# Altium PCB PCB1.PcbDoc
Units mm, origin at the board's own origin, x right, y up, seen from the top; angles counter-clockwise.
Board outline 49.91 x 65.15 mm, 6 copper layers (Top Layer, GND, 5V, 3V3, GND2, Bottom Layer), stack 0.816 mm thick; 24 components, 33 nets, 138 pads, 20 vias.
Unrouted connection lines stored in the file: 6.
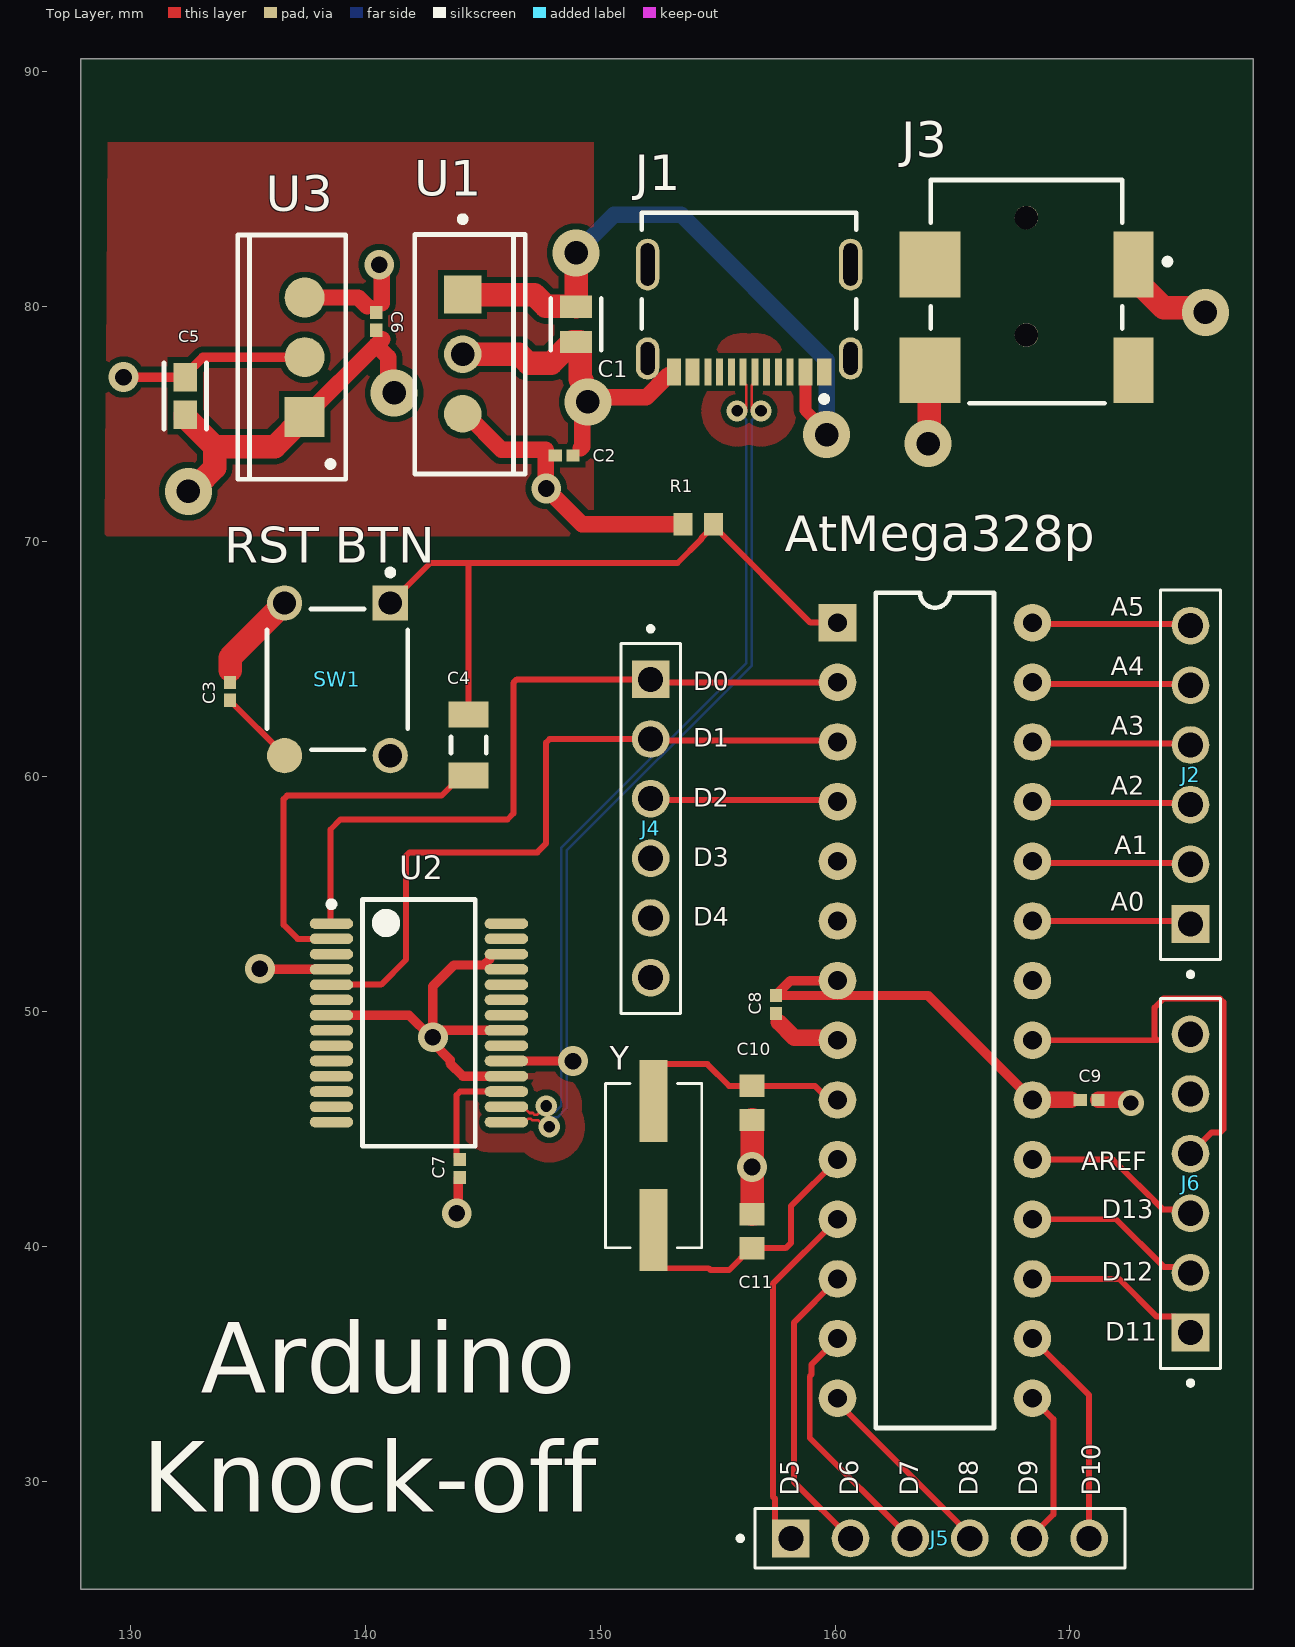
[diagram p0: Top Layer view]
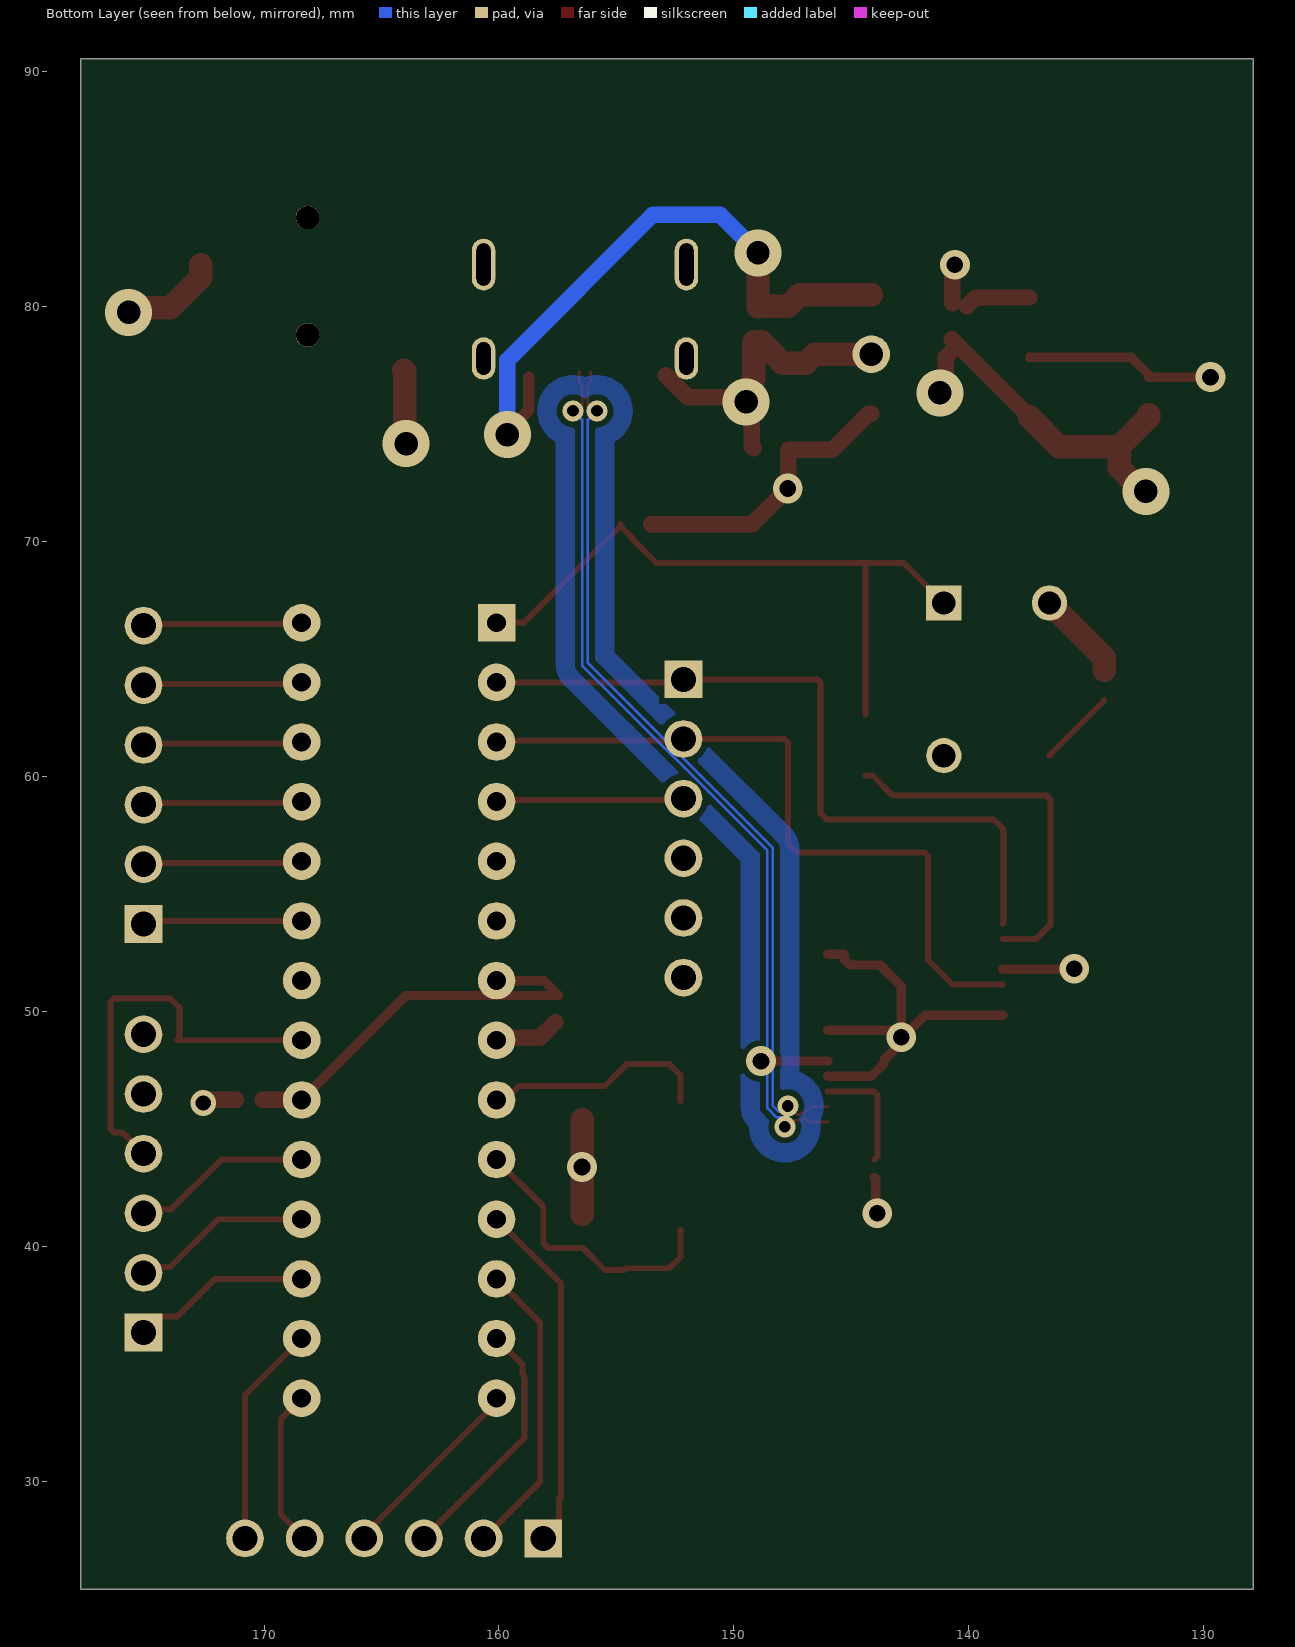
[diagram p1: Bottom Layer view, seen from below]
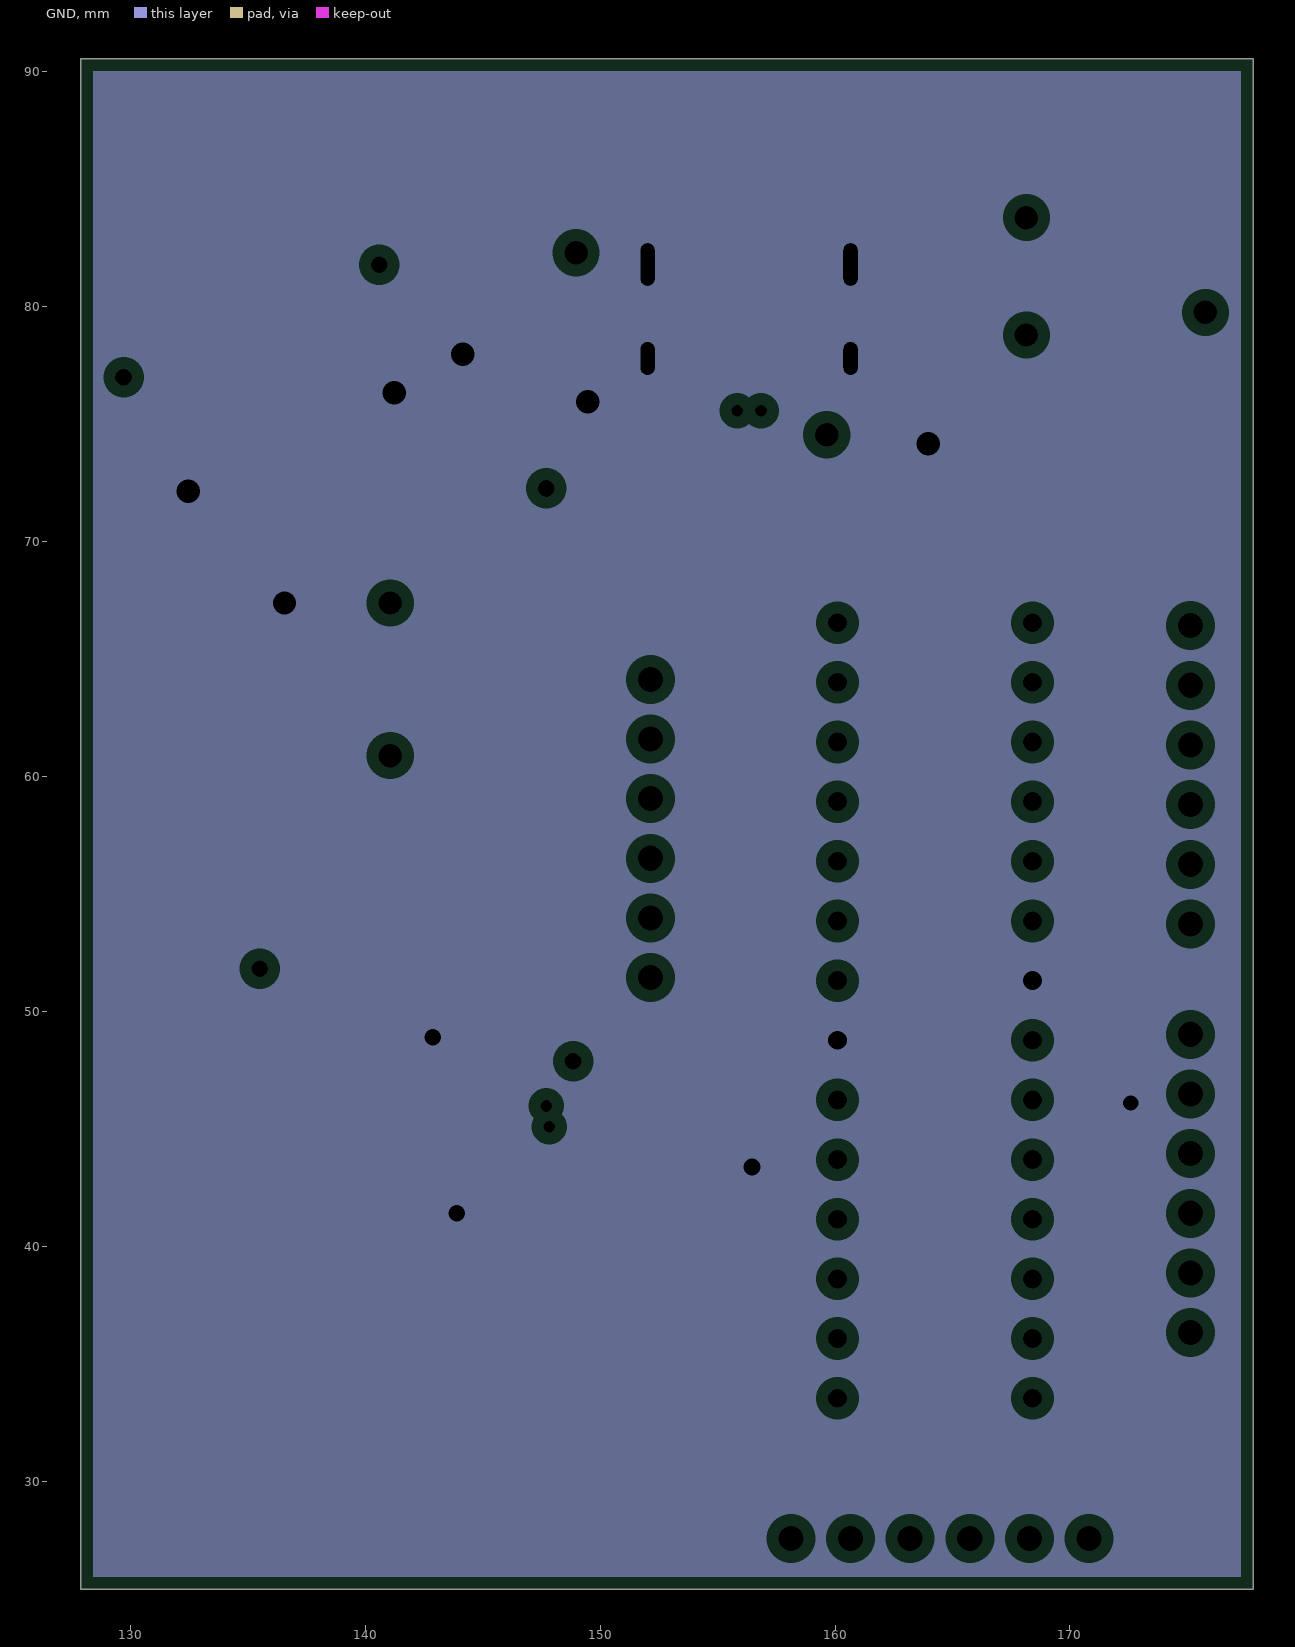
[diagram p2: GND, clearances drawn from the general rule]
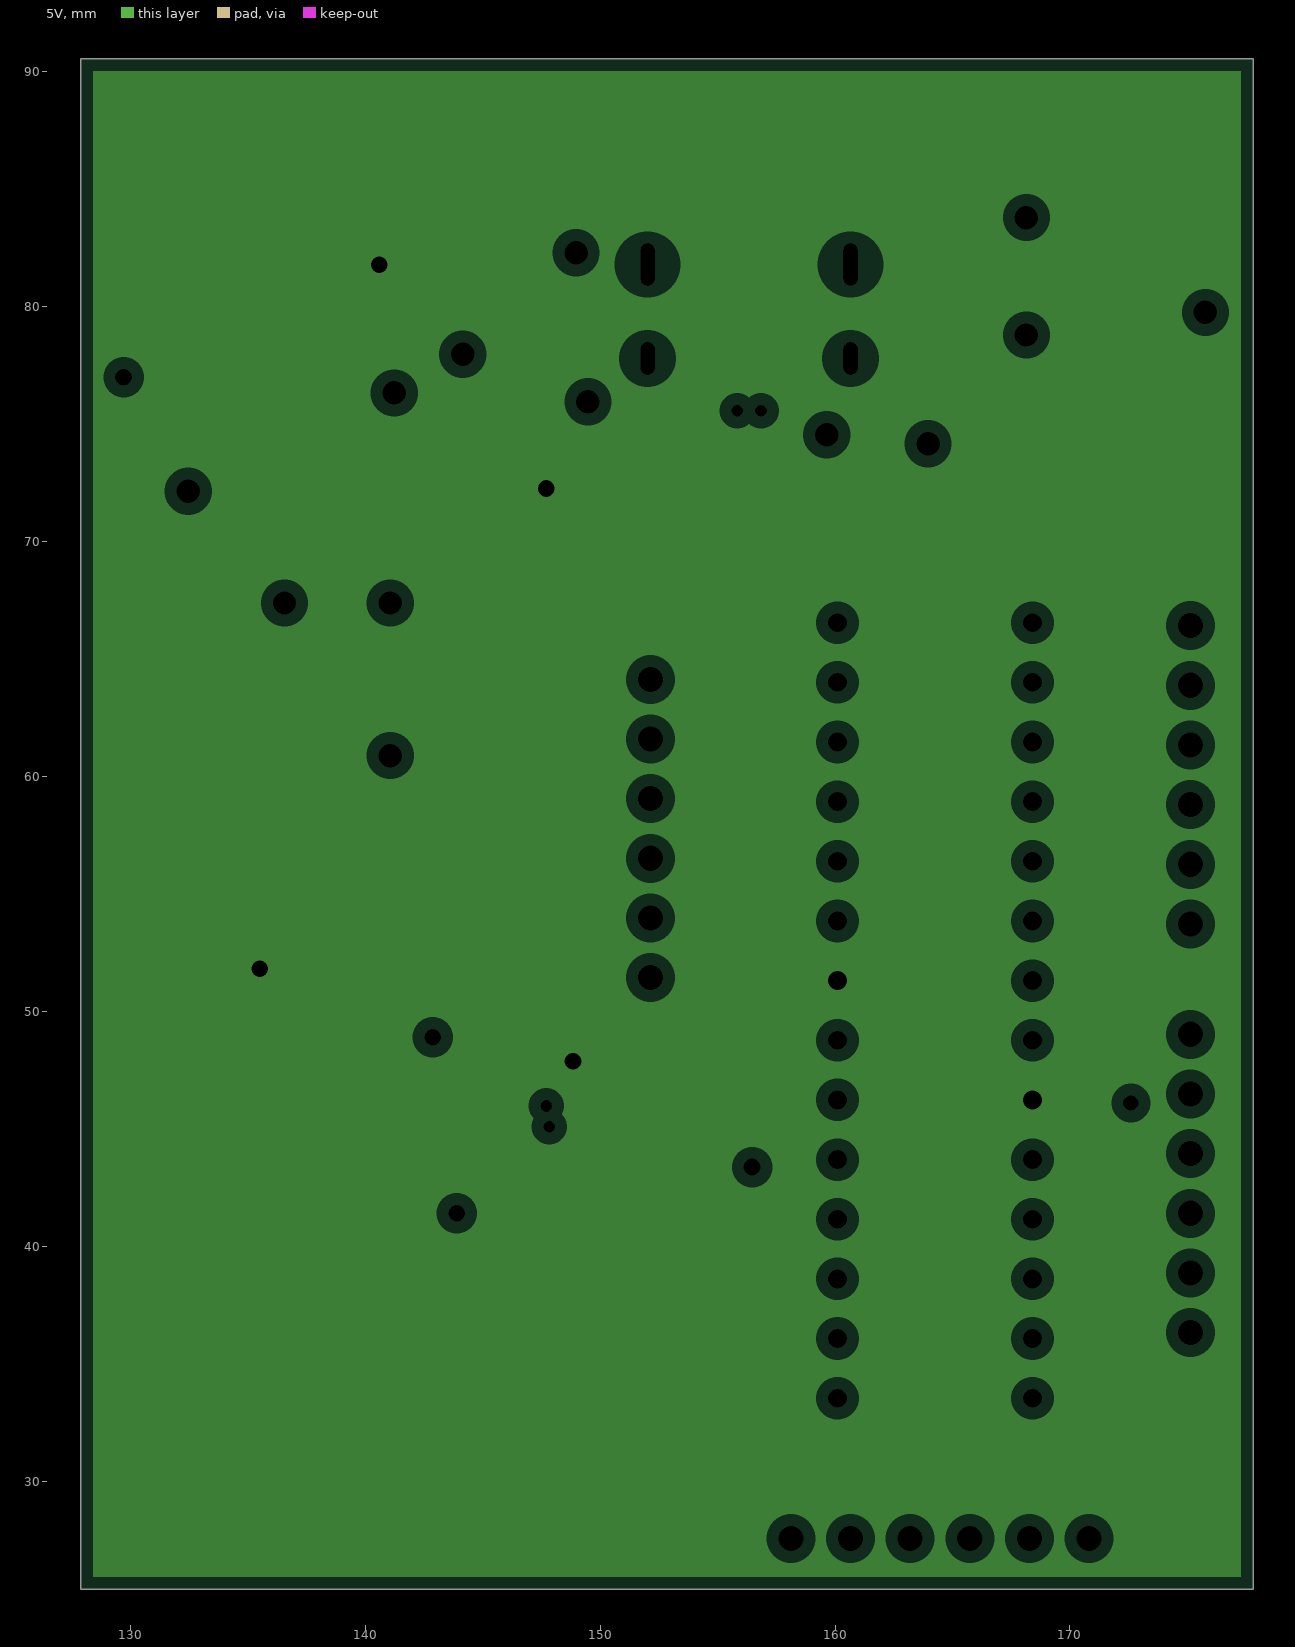
[diagram p3: 5V, clearances drawn from the general rule]
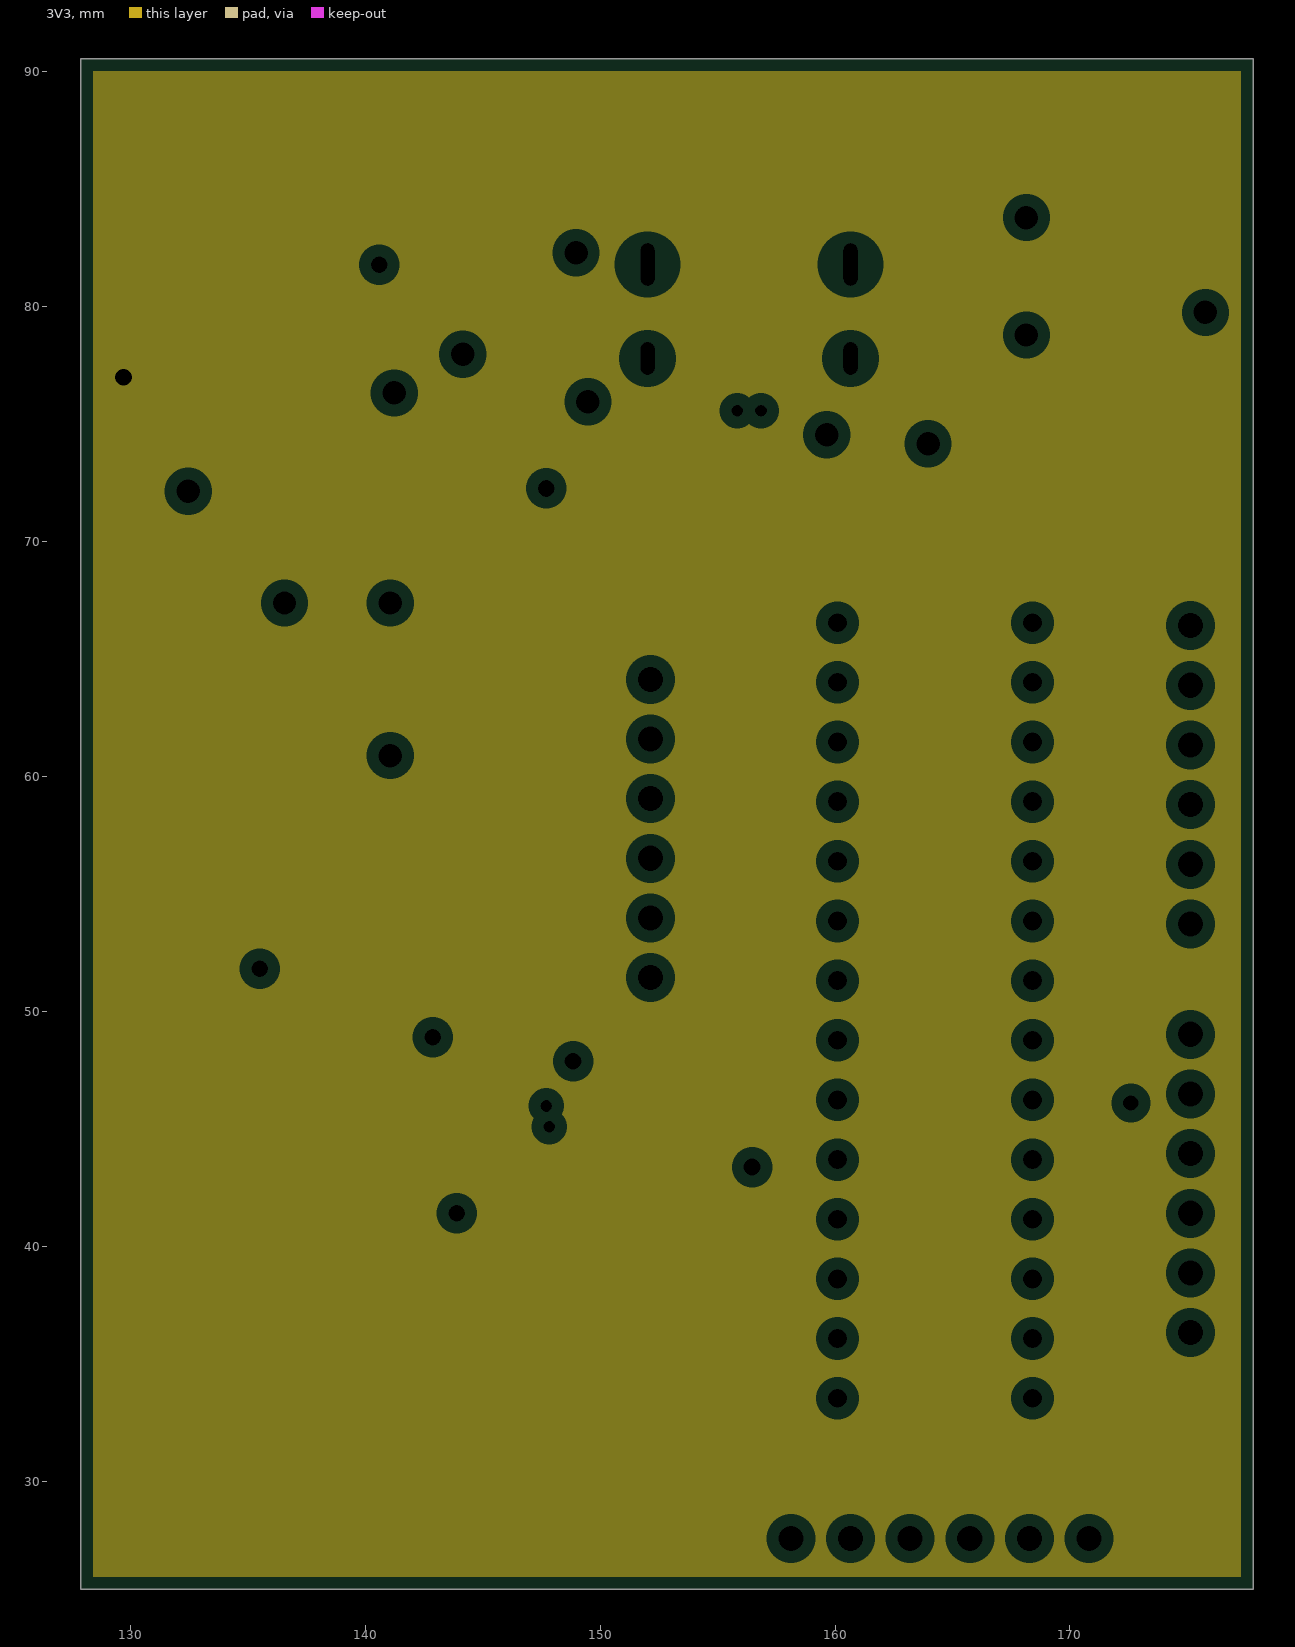
[diagram p4: 3V3, clearances drawn from the general rule]
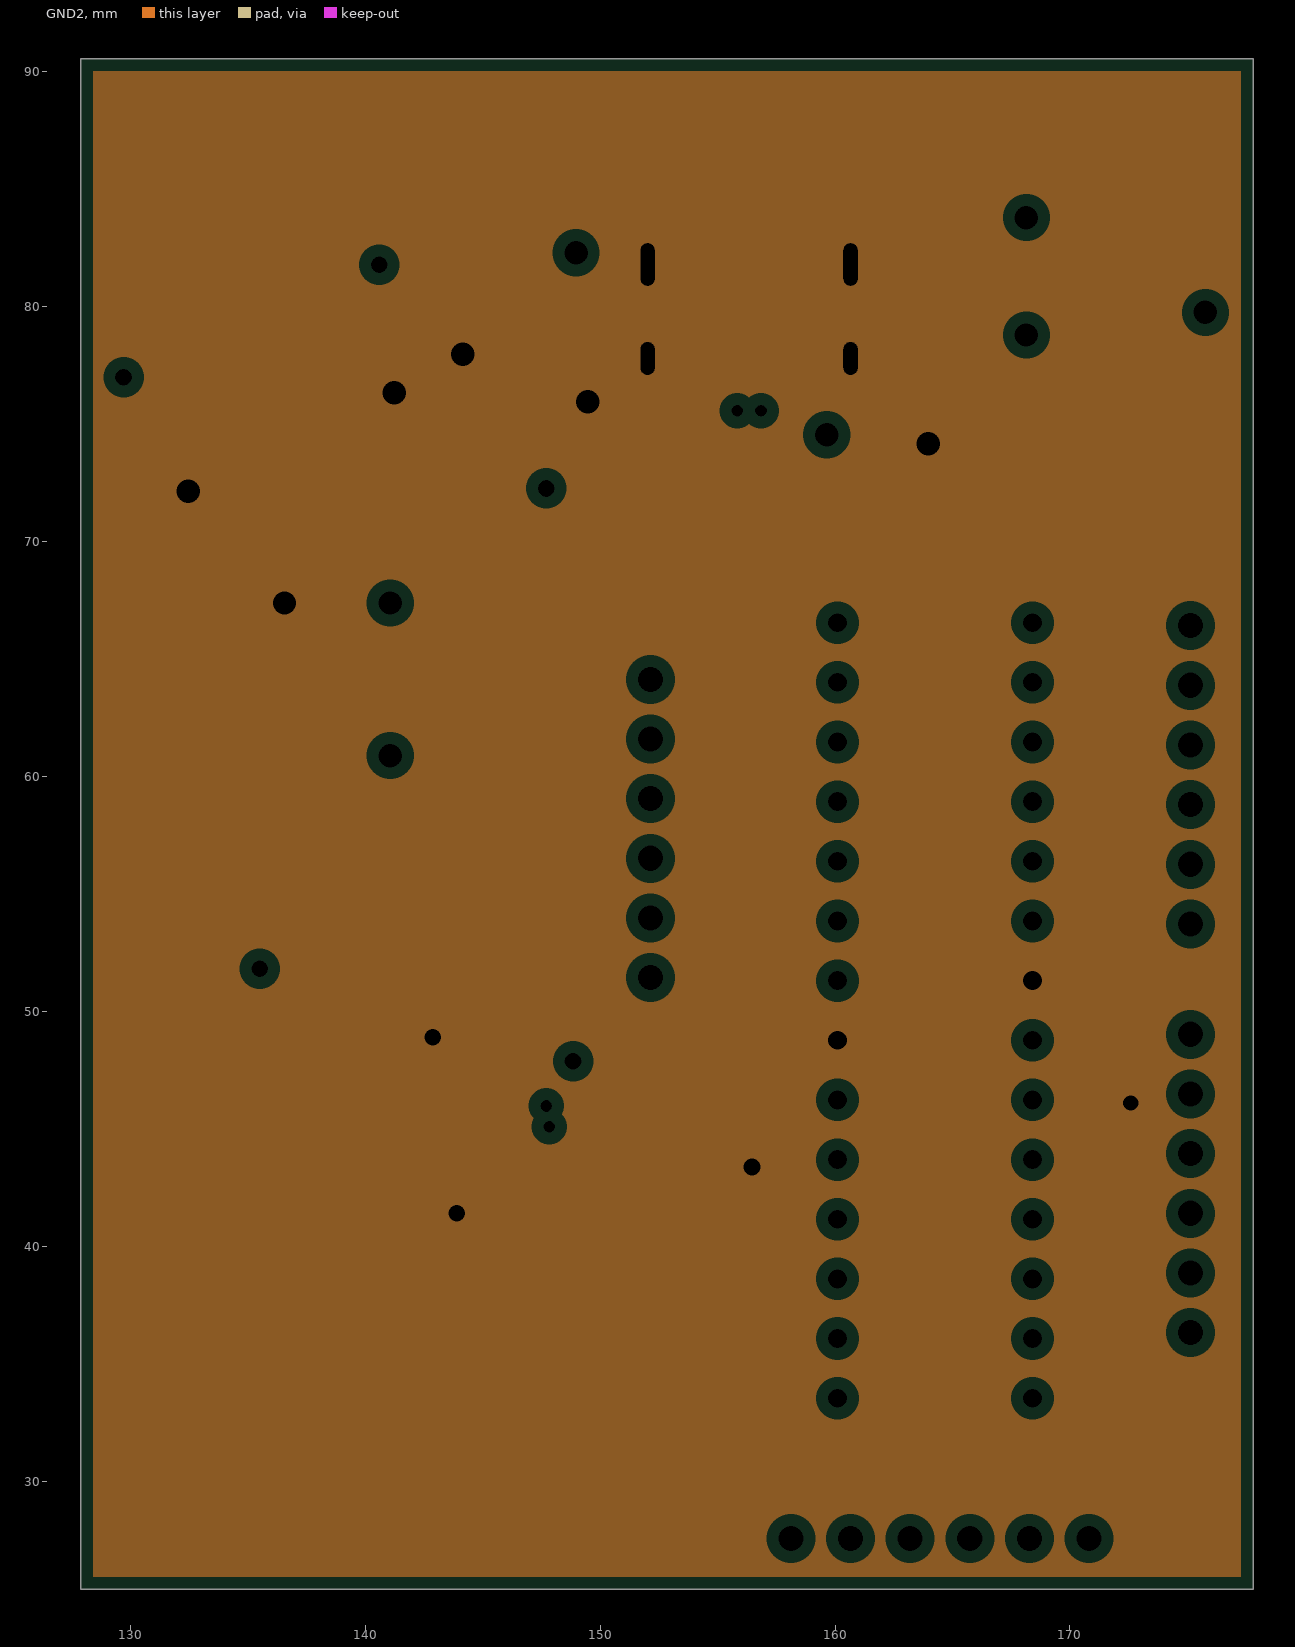
[diagram p5: GND2, clearances drawn from the general rule]
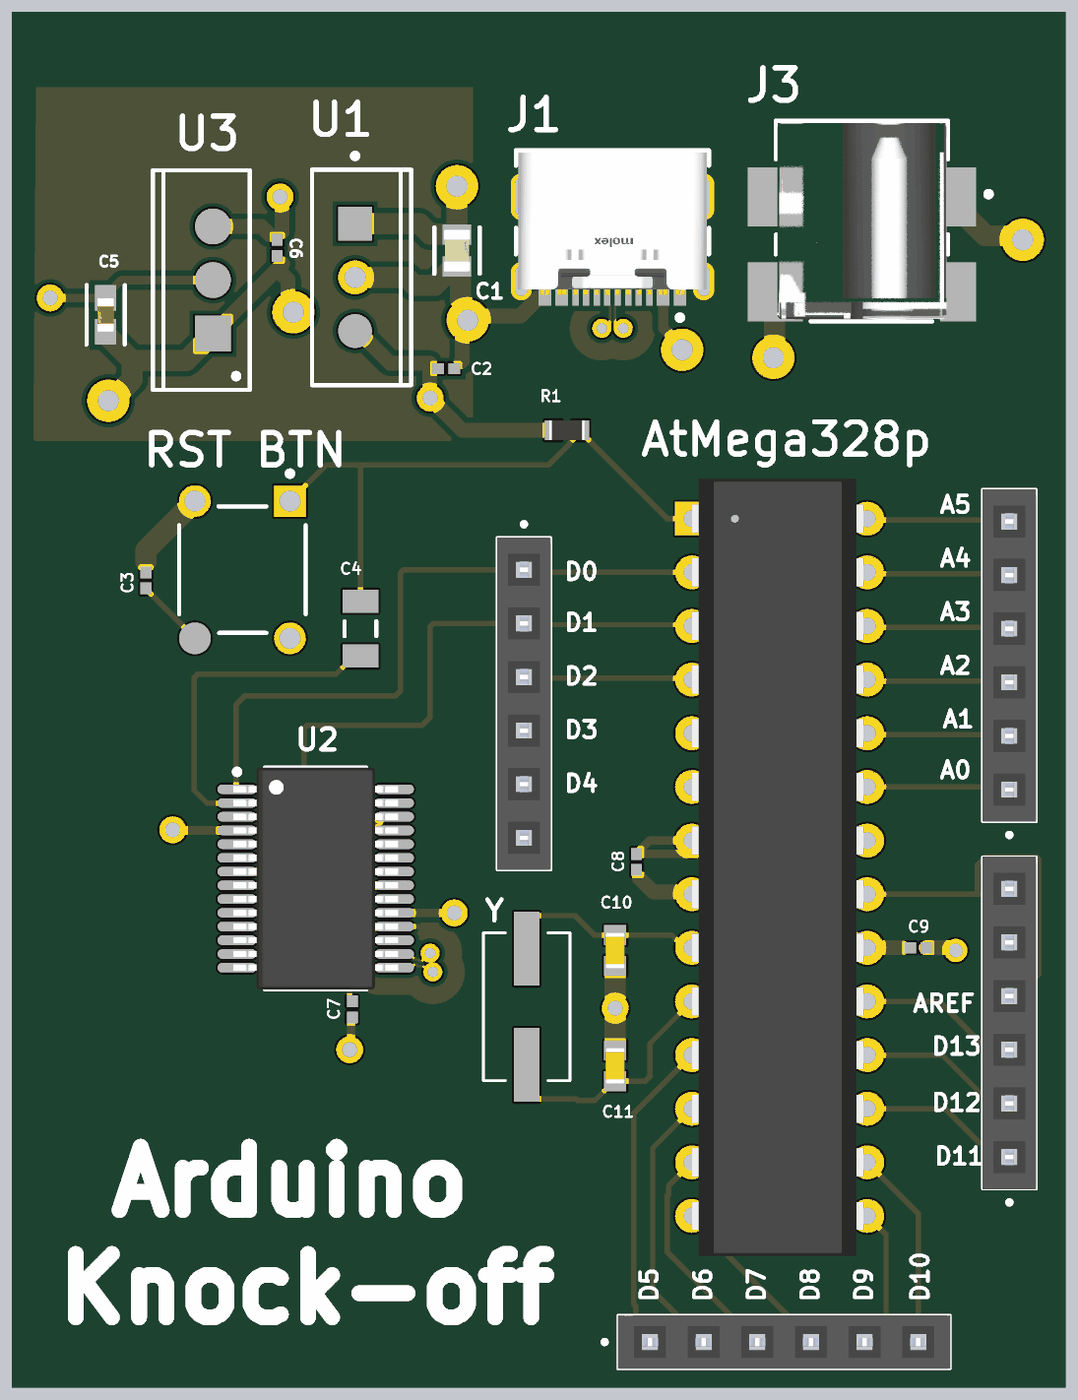
[diagram p6: 3D render of the assembled board from above, using the file's embedded part models]

## Layer stack, top to bottom
Top Solder: solder mask 0.0102, Solder Resist, Dk 3.5
Top Layer: signal copper 0.0356
Dielectric 2: prepreg 0.0711, PP-006, Dk 4.1
GND: plane copper 0.035, net GND
Dielectric 3: prepreg 0.0711, PP-006, Dk 4.1
5V: plane copper 0.035, net +5
Dielectric 1: dielectric 0.32, FR-4, Dk 4.8
3V3: plane copper 0.035, net 3V3
Dielectric 4: prepreg 0.0711, PP-006, Dk 4.1
GND2: plane copper 0.035, net GND
Dielectric 5: prepreg 0.0711, PP-006, Dk 4.1
Bottom Layer: signal copper 0.0356
Bottom Solder: solder mask 0.0102, Solder Resist, Dk 3.5

## Board outline
127.889,25.4 177.8,25.4 177.8,90.551 127.889,90.551

## Design rules (kind name [scope] priority, off if disabled: settings)
Clearance [All] p1: gap=0.254 ignorepadtopadclearanceinfootprint=TRUE except(0: Arc-Hole Track-Hole SMDPad-Hole THPad-Hole Via-Hole Fill-Hole Poly-Hole Region-Hole Text-Hole; 0.05: Arc-SMDPad Track-SMDPad; 0.1: SMDPad-SMDPad; 0.15: Arc-Arc Arc-Track Arc-THPad Track-Track Track-THPad)
DiffPairsRouting [All] p1: maxlimit=0.127 minlimit=0.127 mostfreqgap=0.127 toplayer_minwidth=0.111 toplayer_maxwidth=0.111 toplayer_prefwidth=0.111 bottomlayer_minwidth=0.111 bottomlayer_maxwidth=0.111 bottomlayer_prefwidth=0.111 impedanceprofiledriven=TRUE impedanceprofileid={53F72270-B1B1-47CD-B145-EBD3C2903551} impedanceprofilevalue=90.000000 maxuncoupledlength=12.7
PlaneClearance [All] p1: clearance=0.508
PlaneConnect [All] p1: planeconnectstyle=Relief reliefexpansion=0.508 reliefentries=4 reliefconductorwidth=0.254 reliefairgap=0.254
PolygonConnect [All] p1: connectstyle=Relief reliefconductorwidth=0.254 reliefentries=4 polygonreliefangle="90 Angle" airgapwidth=0.254
RoutingVias [All] p1: holewidth=0.711 width=1.27 viastyle="Through Hole" minholewidth=0.711 minwidth=1.27 maxholewidth=0.711 maxwidth=1.27
SolderMaskExpansion [All] p1: expansion=0.102 istentingtop=FALSE
Width Width_3V3 [InNet('3V3')] p1: maxlimit=0.4 minlimit=0.4 preferedwidth=0.4 minimp=50.000000 maximp=50.000000 favimp=50.000000
Width Width_5V [InNet('+5')] p2: maxlimit=0.7 minlimit=0.4 preferedwidth=0.4 minimp=50.000000 maximp=50.000000 favimp=50.000000
Width Width_GND [InNet('GND')] p3: maxlimit=1 minlimit=0.4 preferedwidth=1 minimp=50.000000 maximp=50.000000 favimp=50.000000
Width Width_VCC [InNet('VCC')] p4: maxlimit=1 minlimit=0.5 preferedwidth=1 minimp=50.000000 maximp=50.000000 favimp=50.000000
Width [All] p5: maxlimit=0.254 minlimit=0.254 preferedwidth=0.254
27 further rules are at their usual default settings.

## Classes and differential pairs
differential pair class USB_DIFF: USB
net class USB_DIFFPAIR: USB_N USB_P
component class Sheet1: AtMega328p C1 C2 C3 C4 C5 C6 C7 C8 C9 C10 C11 J1 J2 J3 J4 J5 J6 R1 SW1
differential pair USB: +USB_P -USB_N

## Components (designator, comment, footprint, x,y, rotation, side; value= is the part's Value field where it differs from the comment)
AtMega328p "ATMEGA328-PU" "atmega v2 - duplicate" 160.102,66.548 r0 top (schematic designator *)
C1 "C0805C334K5RACTU" FP-C0805C-DN-MFG 148.971,79.248 r270 top value="0.33 μF"
C2 "C0402C104K4RACTU" CAPC1005X55X30LL05T10 148.463,73.66 r180 top
C3 "C0402C104K4RACTU" CAPC1005X55X30LL05T10 134.239,63.627 r270 top
C4 "C1206C105K5RACTU" CAPC3216X110X50LL20T25 144.399,61.341 r270 top
C5 "GRM188R60J106ME47D" FP-GRM188-0_1-e0_2_0_55-IPC_A 132.334,76.2 r270 top
C6 "C0402C104K4RACTU" CAPC1005X55X30LL05T10 140.462,79.375 r90 top
C7 "C0402C104K4RACTU" CAPC1005X55X30LL05T10 144.018,43.307 r90 top
C8 "C0402C104K4RACTU" CAPC1005X55X30LL05T10 157.48,50.292 r90 top
C9 "C0402C104K4RACTU" CAPC1005X55X30LL05T10 170.815,46.228 r180 top
C10 "GRM1885C1H220JA01D" CAPC1608X90X35ML10T15 156.464,46.101 r90 top
C11 "GRM1885C1H220JA01D" CAPC1608X90X35ML10T15 156.464,40.64 r270 top
J1 "217179-0001" FP-2171790001-MFG 156.337,80.645 r180 top
J2 "PPTC061LFBN-RC" SULLINS_PPTC061LFBN-RC 175.133,60.071 r90 top
J3 "PJ-018H-SMT-TR" FP-PJ-018H-SMT-TR-MFG 168.148,80.645 r270 top
J4 "PPTC061LFBN-RC" SULLINS_PPTC061LFBN-RC 152.146,57.785 r270 top
J5 "PPTC061LFBN-RC" SULLINS_PPTC061LFBN-RC 164.465,27.559 r0 top
J6 "PPTC061LFBN-RC" SULLINS_PPTC061LFBN-RC 175.133,42.672 r90 top
R1 "CRCW060310K0FKEA" RESC1609X50X30NL8T20 154.178,70.739 r0 top
SW1 "1825910-6" TECO-1825910-6_V 138.811,64.135 r270 top
U1 "LM7805ACT" FAIR-TO-220-3 144.145,77.978 r0 top
U2 "FT232RL" FTDI-SSOP-28_M 142.282,49.511 r0 top
U3 "LD1117V33C" TO220 137.414,77.851 r90 top
Y "ECS-160-20-3X-TR" XTAL_ECS-160-20-3X-TR 152.273,43.434 r270 top

## Footprints (in the part's own frame and the unit in brackets; to place one, negate y for a bottom-side part, rotate by r counter-clockwise, add the part's x,y. Pads: shape width x height; smd on the part's side, far side on the other; paste and mask are expansions set on the pad)
"atmega v2 - duplicate" [mm]
  rect 1.6x1.6 hole 0.8: 1(0,0)
  round 1.6 hole 0.8: 2(0,-2.54) 3(0,-5.08) 4(0,-7.62) 5(0,-10.16) 6(0,-12.7) 7(0,-15.24) 8(0,-17.78) 9(0,-20.32) 10(0,-22.86) 11(0,-25.4) 12(0,-27.94) 13(0,-30.48) 14(0,-33.02) 15(8.3,-33.02) 16(8.3,-30.48) 17(8.3,-27.94) 18(8.3,-25.4) 19(8.3,-22.86) 20(8.3,-20.32) 21(8.3,-17.78) 22(8.3,-15.24) 23(8.3,-12.7) 24(8.3,-10.16) 25(8.3,-7.62) 26(8.3,-5.08) 27(8.3,-2.54) 28(8.3,0)
  silkscreen extent 1.63,-34.29 6.67,1.27, body extent 0,-34.92 8.12,1.91, height 5.21
CAPC1005X55X30LL05T10 [mm] "Chip Capacitor, 2-Leads, Body 1.00x0.50mm, IPC High Density"
  rect 0.56x0.52 smd: 1(-0.38,0) 2(0.38,0)
  body extent -0.53,-0.28 0.53,0.28, height 0.55
CAPC1608X90X35ML10T15 [mm] "Chip Capacitor, 2-Leads, Body 1.7x0.9mm, IPC Low Density"
  rect 0.95x1.05 smd: 1(-0.725,0) 2(0.725,0)
  body extent -0.85,-0.45 0.85,0.45, height 0.9
CAPC3216X110X50LL20T25 [mm] "Chip Capacitor, 2-Leads, Body 3.20x1.60mm, IPC High Density"
  rect 1.1x1.7 smd: 1(-1.3,0) 2(1.3,0)
  silkscreen extent -0.35,-0.75 0.35,0.75, body extent -1.7,-0.9 1.7,0.9, height 1.1
FAIR-TO-220-3 [mm] "FM, 3-Leads, Body 10.2x4.7mm, Pitch 2.54mm"
  rect 1.6x1.6 smd: 1(0,2.54)
  round 1.6 hole 1: 2(0,0)
  round 1.6 smd: 3(0,-2.54)
  silkscreen extent -2.04,-5.1 2.66,5.87, body extent -2.04,-5.1 2.66,5.1, height 18.95
FP-2171790001-MFG [mm]
  rrect100% 1x1.8 hole 1.4 slot 0.6 at 0 deg paste-1000 mask+0: 1(-4.32,2.85) 2(4.32,2.85)
  rrect100% 1x2.2 hole 1.8 slot 0.6 at 0 deg paste-1000 mask+0: 3(-4.32,-1.15) 4(4.32,-1.15)
  rect 0.6x1.15 smd paste+0 mask+0: A1-B12(-3.2,3.425) A4-B9(-2.4,3.425) B1-A12(3.2,3.425) B4-A9(2.4,3.425)
  rect 0.3x1.15 smd paste+0 mask+0: A5(-1.25,3.425) A6(-0.25,3.425) A7(0.25,3.425) A8(1.25,3.425) B5(1.75,3.425) B6(0.75,3.425) B7(-0.75,3.425) B8(-1.75,3.425)
  silkscreen extent -4.57,-3.35 4.57,4.7, body extent -4.92,-3.45 4.92,4.1, height 0.25
FP-C0805C-DN-MFG [mm]
  rect 0.95x1.35 smd paste+0 mask+0: 1(-0.75,0) 2(0.75,0)
  silkscreen extent -1.1,-1.07 1.1,1.07, body extent -1.4,-0.85 1.4,0.85, height 0.25
FP-GRM188-0_1-e0_2_0_55-IPC_A [mm]
  rect 1.208x1.012 smd paste+0 mask+0: 1(-0.802,0) 2(0.802,0)
  silkscreen extent -1.41,-0.91 1.41,0.91, body extent -1.91,-1.01 1.91,1.01, height 0.25
FP-PJ-018H-SMT-TR-MFG [mm]
  rect 2.8x1.7 smd paste+0 mask+0: 1(-1.15,4.55) 1(3.35,4.55)
  rect 2.8x2.6 smd paste+0 mask+0: 2(-1.15,-4.1) 3(3.35,-4.1)
  round 1 hole 1 unplated paste-1000 mask+0: ""(-3.15,0) ""(1.85,0)
  silkscreen extent -4.75,-4.08 4.75,6.13, body extent -4.85,-5.5 4.85,5.5, height 0.25
FTDI-SSOP-28_M [mm] "SOP, 28-Leads, Body 10.5x5.6mm, Pitch 0.65mm, IPC Low Density"
  oval 1.85x0.45 smd: 1(-3.725,4.225) 2(-3.725,3.575) 3(-3.725,2.925) 4(-3.725,2.275) 5(-3.725,1.625) 6(-3.725,0.975) 7(-3.725,0.325) 8(-3.725,-0.325) 9(-3.725,-0.975) 10(-3.725,-1.625) 11(-3.725,-2.275) 12(-3.725,-2.925) 13(-3.725,-3.575) 14(-3.725,-4.225) 15(3.725,-4.225) 16(3.725,-3.575) 17(3.725,-2.925) 18(3.725,-2.275) 19(3.725,-1.625) 20(3.725,-0.975) 21(3.725,-0.325) 22(3.725,0.325) 23(3.725,0.975) 24(3.725,1.625) 25(3.725,2.275) 26(3.725,2.925) 27(3.725,3.575) 28(3.725,4.225)
  silkscreen extent -3.85,-5.25 2.4,5.25, body extent -3.9,-5.25 3.9,5.25, height 2
RESC1609X50X30NL8T20 [mm] "Chip Resistor, 2-Leads, Body 1.65x0.95mm, IPC Medium Density"
  rect 0.8x0.95 smd: 1(-0.65,0) 2(0.65,0)
  body extent -0.82,-0.48 0.82,0.48, height 0.5
SULLINS_PPTC061LFBN-RC [mm]
  rect 1.605x1.605 / inner round 1.605 / far side rect 1.605x1.605 hole 1.07: 1(-6.35,0)
  round 1.605 hole 1.07: 2(-3.81,0) 3(-1.27,0) 4(1.27,0) 5(3.81,0) 6(6.35,0)
  silkscreen extent -8.6,-1.27 7.87,1.27, body extent -7.87,-1.27 7.87,1.27, height 8.51
TECO-1825910-6_V [mm] "Switch, 4-Leads, Body 5.99x5.99mm"
  rect 1.5x1.5 hole 0.99: 1(-3.25,2.25)
  round 1.5 hole 0.99: 2(3.25,2.25) 3(-3.25,-2.25)
  round 1.5 smd: 4(3.25,-2.25)
  silkscreen extent -4.67,-2.99 2.99,3, body extent -3,-2.99 2.99,3, height 5
TO220 [mm] "TO, Thru-Hole, Vertical, Heatsink Mounted; 3 In-Line Leads; Pitch 2.54 mm"
  rect 1.7x1.7 smd: 1(-2.54,0)
  round 1.7 smd: 2(0,0) 3(2.54,0)
  silkscreen extent -5.2,-1.75 5.2,2.85, body extent -5.25,-1.8 5.25,2.9, height 19.7
XTAL_ECS-160-20-3X-TR [mm]
  rect 3.5x1.2 smd: 1(-2.75,0) 2(2.75,0)
  silkscreen extent -3.5,-2.05 3.5,2.05

## Part data
AtMega328p: "MCU 8-bit ATmega AVR RISC 32KB Flash 2.5V/3.3V/5V 28-Pin PDIP - Rail/Tube", Manufacturer=Microchip, Supplier Part Number=1310277P, Category=Microcontrollers, Lead Free=5697LeadFree, Manufacturer Part Number=ATMEGA328-PU, Pricing="25=2.048, 100=1.972 (GBP)", RoHS=Yes, Stock=1128, Supplier=Rs
C1: library part CMP-1036-04607-3, "CAP CER 0.33UF 50V X7R 0805", Capacitance="0.33 μF", Manufacturer=KEMET, Package=C0805C-DN, Temperature="-55°C to +125°C", Temperature Characteristic=X7R, Temperature Coefficient=30ppm/°C, Temperature Range High=+125°C, Temperature Range Low=-55°C, Tolerance=0.1, Voltage Rating="50 V", Automotive=No, Category=Cap, ComponentLink2Description=Datasheet, ComponentLink2URL=https://content.kemet.com/datasheets/KEM_C1003_C0G_SMD.pdf, Device Class L1="Passive Components", Device Class L2=Capacitors, Device Class L3="Ceramic Capacitors", Digikey Description="CAP CER 0.33UF 50V X7R 0805", Height=0.88mm, Ipc Land Pattern Name=CAPC200125X78, Lead Free=Yes, Manufacturer Part Number=C0805C334K5RACTU, Material=Ceramic, Mouser Description="Multilayer Ceramic Capacitors MLCC - SMD/SMT 50volts 0.33uF 10% X7R", Octopart=https://octopart.com/c0805c334k5ractu-kemet-10475704, RoHS=TRUE
C2 C3 C6 C7 C8 C9: library part CMP-0001-00074-2, "0.1uf", Manufacturer=Kemet, Part Number=C0402C104K4RACTU
C4: library part CMP-2000-06011-1, "Chip Capacitor, 1 uF, +/- 10%, 50 V, -55 to 125 degC, 1206 (3216 Metric), RoHS, Tape and Reel", Capacitance=1uF, Capacitance - nF=1000nF, Case Code - in=1206, Case Code - mm=3216, Case Height=1mm, Case Length=3.2mm, Case Width=1.6mm, Dielectric=X7R, Manufacturer=Kemet, Maximum Operating Temperature=+125C, Minimum Operating Temperature=-55C, Operating Temperature Range=-55Cto+125C, Package / Case=1206(3216metric), Package Description="2-Pin Surface Mount Device, Body 3.2 x 1.6 mm", Temperature Coefficient / Code=+/-15%, Tolerance=10%, Voltage Rating=50V, Brand=Kemet, Class=Class1, Datasheet URL=http://www.kemet.com/docfinder?Partnumber=C1206C105K5RACTU, Datasheet Version=02/2016, Dimensions=1.6mmWx3.2mmLx1mmH, Factory Pack Quantity=2500, Manufacturer URL=http://www.kemet.com/, Mounting Technology=SurfaceMount, Package Reference=1206, Packaging=Reel, Product=GeneralTypeMLCCs, Product Category=MultilayerCeramicCapacitorsMLCC-SMD/SMT, RoHS=Details, Series=C1206C, Termination Style=SMD/SMT, Type=SMDMLCCX7R6.3-250VDCCommericalGrade, Voltage Rating DC=50V
C5: library part CMP-2006-02792-2, "Chip Multilayer Ceramic Capacitors for General Purpose, 0603, 10uF, X5R, 15%, 20%, 6.3V", Capacitance=10uF, Case Code (Imperial)=0603, Case Code (Metric)=1608, Dielectric=X5R, Max Operating Temperature=85°C, Min Operating Temperature=-55°C, Package Quantity=4000, Tolerance=20%, Voltage=6.3V, Case/Package=0603, Depth=0.8mm, Height=0.8mm, Lead Free="Lead Free", Length=1.6mm, Material=Ceramic, Mount="Surface Mount", Packaging="Tape and Reel", Radiation Hardening=No, REACH SVHC="No SVHC", Termination=SMD/SMT, Thickness=0.035inch, Voltage Rating=6.3V, Voltage Rating (DC)=6.3V, Width=0.031inch
C10 C11: library part CMP-2000-04945-1, "Chip Capacitor, 22 pF, +/- 5%, 50 V, -55 to 125 degC, 0603 (1608 Metric), RoHS, Tape and Reel", Capacitance=22pF, Case Size/Dimension=0603, Dielectric=C0G, Manufacturer=Murata, Package Description="2-Pin Surface Mount Device, Body 1.6 x 0.8 mm", Package Reference=603, Rated Voltage=50V, Tolerance (%)=±5%, Datasheet URL=https://datasheet.ciiva.com/11786/0900766b807a1cab-11786398.pdf, Datasheet Version=Jul-06, Manufacturer URL=http://www.murata.com/
J1: library part CMP-04767-000028-2, "CONN RCP USB2.0 TYP C 24P SMD RA", Current Rating=1.25A, Max Operating Temperature=85°C, Min Operating Temperature=-40°C, Voltage Rating=30V, Contact Material="Gold, Nickel", Gender=Receptacle, Height=3.36mm, NexarPartId=117190526, Number of Contacts=16, USB Standard="USB 2.0"
J2 J4 J5 J6: "6 Position Header Connector 0.100 (2.54mm) Through Hole Tin", Package=None, Check_prices=https://www.snapeda.com/parts/PPTC061LFBN-RC/Sullins+Connector+Solutions/view-part/?ref=eda, MF="Sullins Connector", MP=PPTC061LFBN-RC, SnapEDA_Link=https://www.snapeda.com/parts/PPTC061LFBN-RC/Sullins+Connector+Solutions/view-part/?ref=snap
J3: library part CMP-14830-000007-1, "CONN PWR JACK 1.7X4MM SOLDER", Current Rating=5A, Manufacturer=CUI, Package=0, Temperature="-25°C to +85°C", Temperature Range High=+85°C, Temperature Range Low=-25°C, Voltage Rating=24V, Automotive=No, Category=Conn, ComponentLink2Description=Datasheet, ComponentLink2URL=https://www.cuidevices.com/product/resource/pj-018h-smt-tr.pdf, Conn Gender=Male, Conn Orientation="Right Angle", Contact Material=Nickel,Silver, Device Class L1=Connectors, Device Class L2="Power Connectors", Device Class L3=unset, Digikey Description="CONN PWR JACK 1.7X4MM SOLDER", Height=5.6mm, Lead Free=Yes, Manufacturer Part Number=PJ-018H-SMT-TR, Mouser Description="DC Power Connectors Power Jacks", Number of Contacts=1, Octopart=https://octopart.com/pj-018h-smt-tr-cui-25947163, RoHS=TRUE, Standoff Height=0.1mm
R1: library part CMP-1666-00005-4, "Chip Resistor, 10 KOhm, +/- 1%, 100 mW, -55 to 155 degC, 0603 (1608 Metric), RoHS, Tape and Reel", Manufacturer="Vishay Semiconductor", Max Operating Temperature="155 degC", Min Operating Temperature="-55 degC", Package Quantity=5000, Voltage Rating="75 V", ComponentLink1Description="Manufacturer URL", ComponentLink1URL=http://www.vishay.com/, ComponentLink2Description=Datasheet, ComponentLink2URL=https://datasheet.ciiva.com/11809/0900766b80d98afc-11809037.pdf, DatasheetVersion=06/2012, Height="0.45 mm", Length="1.55 mm", Mounting Technology="Surface Mount", PackageDescription="2-Pin Surface Mount Device, Body 1.575 x 0.85 mm", PackageReference=0603, Packaging="Tape and Reel", REACH SVHC=Unknown, RoHSCompliant=true
SW1: library part CMP-1684-00021-1, "Tact Switch, SPST-NO, 0.05 A, -35 to 85 degC, 4-Pin THD, RoHS, Bulk", Actuator Color=Black, Contact Rating @ Voltage=0.05A@24VDC, Dielectric Strength=500VAC, Manufacturer="TE Connectivity", Maximum AC Voltage Rating=N/A, Maximum Contact Resistance=100mOhm, Maximum DC Voltage Rating=24V, Minimum Insulation Resistance=100MOhm, Operating Temperature=-35to85C, Package Description="4-Pin Through Hole Device, Body 5.99 x 5.99 mm, Pitch 6.5 mm", Package Reference=THD, Actuator Length=1.4mm, Actuator Material=PolybutyleneTerephthalate, Actuator Style=RoundButton, Base Material=N/A, Body Orientation=Straight, Bushing Type=Unthreaded, Contact Material=CopperAlloy, Contact Plating=Silver, Datasheet URL=http://www.te.com/commerce/DocumentDelivery/DDEController?Action=showdoc&DocId=Customer+Drawing%7F1825910%7FC9%7Fpdf%7FEnglish%7FENG_CD_1825910_C9.pdf%7F1825910-6, Datasheet Version="Rev. C9", Dimension=5.99x5mm, Electrical Life=100000Cycles, Family=1825910, Function=MomentaryContact, Housing Material=N/A, Illumination=N/R, Manufacturer URL=http://www.te.com, Mechanical Life=100000Cycles, Mounting=ThroughHole, Packaging=N/A, Part No=1825910-6, Pole Throw Configuration=SPST, Product Weight=N/A, RoHS=Yes, Seal Description=N/A, Seal Location=N/A, Switch Configuration=OFF(ON), Terminal Type=PCPins, Thread Size=N/R
U1: library part CMP-2000-04937-1, "Positive Voltage Regulator, 5 V, 1 A, 0 to 125 degC, 3-Pin TO-220, RoHS, Tube", Dropout Voltage Measurement Current=1A, Manufacturer=Fairchild, Maximum Input Voltage=35V, Maximum Operating Temperature=+125degC, Minimum Operating Temperature=0degC, Output Voltage=5V, Package Description="3-Pin Through Hole Device, Body 10 x 4.5 mm, Pitch 2.54 mm", Package Reference=TO-220, Quiescent Current=6mA, Typical Dropout Voltage @ Current=2V@1A, Datasheet URL=https://datasheet.ciiva.com/5816/1359194-5816420.pdf, Datasheet Version="Rev. 1.0.1, 05/2006", Dimensions=10.67x4.83x16.51mm, Height=16.51mm, Length=10.67mm, Line Regulation=50mV, Load Regulation=100mV, Manufacturer URL=https://www.fairchildsemi.com/, Maximum Output Current=1A, Mounting Type=ThroughHole, Number of Outputs=1, Output Type=Fixed, Package Type=TO-220, Package URL=https://www.fairchildsemi.com/package-drawings/TO/TO220B03.pdf, Pin Count=3, Polarity=Positive, Regulator Function=Linear, Series=LM78xx, Width=4.83mm
U2: library part CMP-2000-05029-1, "IC USB FS SERIAL UART 28-SSOP", Manufacturer=FTDI, Maximum Operating Temperature=+85degC, Minimum Operating Temperature=-40degC, Package Type=SSOP, Datasheet URL=http://datasheet.octopart.com/FT232RL-FTDI-datasheet-120501.pdf, Datasheet Version="Rev. 1.04, 02/2006", Dimensions=10.2x5.3x1.75mm, Height=1.75mm, Length=10.2mm, Manufacturer URL=http://www.ftdichip.com/, Maximum Data Rate=3MBd, Mounting Type=SurfaceMount, Number of Channels per Chip=1, Pin Count=28, Receive FIFO=256B, Transmit FIFO=128B, Width=5.3mm
U3: library part CMP-0244-00471-1, "Fixed Low Drop Positive Voltage Regulator, 3.3V, 3-Pin TO-220", ComponentLink1Description="Manufacturer URL", ComponentLink1URL=http://www.st.com, ComponentLink2Description=Datasheet, ComponentLink2URL=http://www.st.com/internet/com/TECHNICAL_RESOURCES/TECHNICAL_LITERATURE/DATASHEET/CD00000544.pdf, ComponentLink3Description="Package Specification", ComponentLink3URL=http://www.st.com/internet/com/TECHNICAL_RESOURCES/TECHNICAL_LITERATURE/PACKAGE_INFORMATION/CD00004649.pdf, DatasheetVersion=1/11/2011, PackageDescription="TO, Thru-Hole, Vertical, Heatsink Mounted; 3 In-Line Leads; Pitch 2.54 mm", PackageReference=TO220, PackageVersion=ver3.0
Y: "16MHz Â±30ppm Crystal 20pF 50 Ohms HC-49/US", Package="HC49/US ECS International", Digi-Key_Part_Number=XC1776CT-ND, Digi-Key_Purchase_URL=https://www.digikey.com/product-detail/en/ecs-inc/ECS-160-20-3X-TR/XC1776CT-ND/2676640?utm_source=snapeda&utm_medium=aggregator&utm_campaign=symbol, MF="ECS Inc.", MP=ECS-160-20-3X-TR, SnapEDA_Link=https://www.snapeda.com/parts/ECS-160-20-3X-TR/ECS%20Inc./view-part/561589/?ref=snap

## Via types
v1: diameter 1.27, hole 0.711, Top Layer to Bottom Layer, 8 vias
v2: diameter 2, hole 1, Top Layer to Bottom Layer, 7 vias
v3: diameter 0.9, hole 0.5, Top Layer to Bottom Layer, 4 vias
v4: diameter 1.1, hole 0.65, Top Layer to Bottom Layer, 1 vias

## Nets (pads, with @x,y where several pads share a name; then routed paths per layer and width w, separated by ;. In a path a pad name is that pad's centre, name@x,y a point inside that pad or via, vN(x,y) a via of type N, cw(c..) or ccw(c..) an arc to the next point about the centre after c; other vN are vias at no path point)
3V3: C5.1 U3.2 | length 8.2
  Top Layer w0.4: v1@129.667,76.962 v1(129.707,77.002) C5.1 132.334,77.1 133.085,77.851 U3.2
+5: AtMega328p.7 AtMega328p.20 C2.2 C6.2 C8.2 C9.2 R1.1 U1.3 U2.4 U2.19 U2.20 U3.3 | length 39.3
  Top Layer w0.4: v1(135.509,51.816) 135.539,51.786 U2.4 ; U2.19 148.583,47.886 v1@148.59,47.879 ; AtMega328p.7 158.096,51.308 157.48,50.692 C8.2 163.958,50.672 AtMega328p.20
  Top Layer w0.7: U3.3 139.7,80.391 140.081,80.01 ; v1(140.589,81.788) 140.698,81.679 140.698,80.155 ; U1.3 144.272,75.438 145.796,73.914 147.676,73.914 v1@147.676,72.669 ; v1(147.701,72.263) 149.225,70.739 R1.1 ; AtMega328p.20 170.053,46.228
  other v1: 148.844,47.879
GND: AtMega328p.8 AtMega328p.22 C1.2 C2.1 C3.1 C5.2 C6.1 C7.1 C8.1 C9.1 C10.1 C11.1 J1.1 J1.2 J1.3 J1.4 J1.A1-B12 J1.B1-A12 J3.3 SW1.3 U1.2 U2.7 U2.18 U2.21 U2.25 U2.26 U3.1 | length 62.5
  Top Layer w0.4: U2.7 141.861,49.836 v1@142.802,48.895 ; v1@143.239,49.186 U2.21 ; v1(143.891,41.402) 143.958,41.469 143.958,42.867 C7.1 ; U2.18 144.153,47.236 143.607,47.782 143.607,47.927 142.875,48.66 v1(142.875,48.895) 142.875,51.073 143.773,51.971 145.048,51.971 145.297,52.221 145.297,52.413 145.321,52.436 U2.26
  Top Layer w0.7: U3.1 140.462,78.359 ; 140.716,78.613 140.462,78.359 ; v2(141.224,76.327) 140.975,76.576 140.975,77.846 140.462,78.359 ; 149.161,73.978 149.23,74.047 149.23,75.697 v2(149.479,75.946) ; v2@149.67,76.137 151.956,76.137 J1.B1-A12@152.908,77.089 ; 157.607,49.53 158.254,48.883 AtMega328p.8@159.987,48.883 ; C9.1 v4@172.339,46.228
  Top Layer w1: C5.2 132.334,75.3 133.593,74.041 ; v2@132.842,72.39 133.593,73.141 133.593,74.041 ; 134.239,64.516 134.239,65.063 SW1.3 ; U3.1 136.144,74.041 133.593,74.041 ; v1@142.802,48.895 v1(142.875,48.895) ; U1.2 146.558,77.978 146.939,77.597 147.92,77.597 148.821,78.498 C1.2 149.121,78.498 149.146,78.473 149.146,76.914 v2@149.225,76.835 ; v2(149.479,75.946) v2@149.67,76.137 ; C11.1 v1(156.464,43.37) C10.1 ; AtMega328p.8@159.987,48.883 AtMega328p.8 ; v2(163.957,74.168) 164.002,74.213 164.002,77.249 J3.3
  other v2: 132.461,72.136
  other v4: 172.593,46.101
Net*_1: AtMega328p.1 C4.1 R1.2 SW1.1 | length 28.6
  Top Layer w0.254: SW1.1 142.764,69.088 144.399,69.088 ; C4.1 144.399,69.088 ; R1.2 R1.2@154.828,70.664 ; AtMega328p.1 158.944,66.548 R1.2@154.828,70.664 ; 144.399,69.088 153.291,69.088 154.309,70.106 154.309,70.145 R1.2@154.828,70.664
Net*_2: AtMega328p.2 J4.1 U2.1 | length 31.6
  Top Layer w0.254: U2.1 138.515,53.778 138.515,57.743 138.938,58.166 146.05,58.166 146.304,58.42 146.304,63.986 146.453,64.135 J4.1 152.273,64.008 AtMega328p.2
Net*_3: AtMega328p.3 J4.2 U2.5 | length 31
  Top Layer w0.254: U2.5 140.671,51.136 141.732,52.197 141.732,56.62 141.881,56.769 147.32,56.769 147.701,57.15 147.701,61.446 147.85,61.595 J4.2 152.209,61.531 160.038,61.531 AtMega328p.3
Net*_4: AtMega328p.4 J4.3 | length 8
  Top Layer w0.254: J4.3 152.209,58.991 160.038,58.991 AtMega328p.4
Net*_5: AtMega328p.5 J4.4
Net*_6: AtMega328p.6 J4.5
Net*_9: AtMega328p.9 C10.2 Y.1 | length 9.8
  Top Layer w0.254: Y.1 152.273,47.279 152.746,47.752 154.559,47.752 155.485,46.826 C10.2 159.14,46.826 159.738,46.228 AtMega328p.9
Net*_10: AtMega328p.10 C11.2 Y.2 | length 12.1
  Top Layer w0.254: Y.2 152.273,39.534 152.746,39.061 154.614,39.061 154.686,38.989 155.488,38.989 156.414,39.915 C11.2 157.898,39.915 158.115,40.132 158.115,41.701 AtMega328p.10
Net*_11: AtMega328p.11 J5.1 | length 15
  Top Layer w0.254: J5.1 157.439,28.235 157.439,29.251 157.353,29.337 157.353,38.399 AtMega328p.11
Net*_12: AtMega328p.12 J5.2 | length 12.8
  Top Layer w0.254: AtMega328p.12 158.242,36.748 158.242,29.972 J5.2
Net*_13: AtMega328p.13 J5.3 | length 10.8
  Top Layer w0.254: AtMega328p.13 159.004,34.97 159.004,34.544 158.921,34.461 158.921,31.833 J5.3
Net*_14: AtMega328p.14 J5.4 | length 8.3
  Top Layer w0.254: AtMega328p.14 160.102,33.36 165.735,27.727 J5.4
Net*_15: AtMega328p.15 J5.5 | length 6.8
  Top Layer w0.254: J5.5 169.291,28.575 169.291,32.639 AtMega328p.15
Net*_16: AtMega328p.16 J5.6 | length 9.5
  Top Layer w0.254: AtMega328p.16 170.815,33.655 J5.6
Net*_17: AtMega328p.17 J6.1 | length 7.7
  Top Layer w0.254: AtMega328p.17 172.085,38.608 173.695,36.998 174.457,36.998 J6.1
Net*_18: AtMega328p.18 J6.2 | length 7.7
  Top Layer w0.254: AtMega328p.18 171.958,41.148 173.985,39.121 174.874,39.121 J6.2
Net*_19: AtMega328p.19 J6.3 | length 7.7
  Top Layer w0.254: AtMega328p.19 171.831,43.688 173.949,41.57 174.965,41.57 J6.3
Net*_21: AtMega328p.21 J6.4 | length 17.1
  Top Layer w0.254: AtMega328p.21 173.714,48.768 173.609,48.873 173.609,50.165 173.99,50.546 176.381,50.546 176.53,50.397 176.53,44.98 176.381,44.831 176.022,44.831 J6.4
Net*_23: AtMega328p.23 J2.1 | length 6.8
  Top Layer w0.254: AtMega328p.23 175.006,53.848 J2.1
Net*_24: AtMega328p.24 J2.2 | length 6.8
  Top Layer w0.254: AtMega328p.24 168.465,56.325 175.07,56.325 J2.2
Net*_25: AtMega328p.25 J2.3 | length 6.8
  Top Layer w0.254: AtMega328p.25 168.465,58.864 175.07,58.864 J2.3
Net*_26: AtMega328p.26 J2.4 | length 6.8
  Top Layer w0.254: AtMega328p.26 168.465,61.404 175.07,61.404 J2.4
Net*_27: AtMega328p.27 J2.5 | length 6.8
  Top Layer w0.254: AtMega328p.27 168.465,63.944 175.07,63.944 J2.5
Net*_28: AtMega328p.28 J2.6 | length 6.8
  Top Layer w0.254: AtMega328p.28 168.465,66.484 175.07,66.484 J2.6
NetC3_2: C3.2 SW1.4 | length 3.3
  Top Layer w0.254: C3.2 134.239,63.227 136.561,60.905 SW1.4
NetC4_2: C4.2 U2.2 | length 15.9
  Top Layer w0.254: U2.2 137.119,53.086 136.525,53.68 136.525,59.033 136.674,59.182 143.24,59.182 144.099,60.041 C4.2
NetC7_2: C7.2 U2.17 | length 5
  Top Layer w0.254: C7.2 143.891,43.814 143.891,46.437 144.04,46.586 U2.17
USB_N: J1.A7 U2.16 | length 37.2
  Top Layer w0.111: U2.16 146.732,45.936 146.996,45.672 147.132,45.672 147.207,45.596 147.299,45.596 147.677,45.974 v3(147.701,45.974) ; J1.A7 156.087,76.795 156.218,76.664 v3@156.218,75.565
  Bottom Layer w0.111: v3@147.955,45.72 148.082,45.72 148.336,45.974 148.336,56.947 156.218,64.829 156.218,75.175 155.829,75.564 v3(155.829,75.565)
USB_P: J1.A6 U2.15 | length 37.6
  Top Layer w0.111: U2.15 146.793,45.286 146.942,45.434 147.033,45.434 147.109,45.358 147.368,45.358 147.642,45.085 v3(147.828,45.085) ; v3@156.456,75.565 156.456,76.664 156.587,76.795 J1.A6
  Bottom Layer w0.111: v3@147.955,45.482 148.18,45.482 148.574,45.876 148.574,56.849 156.456,64.731 156.456,75.175 156.845,75.564 v3(156.845,75.565)
VCC: C1.1 J1.A4-B9 J1.B4-A9 J3.1@172.698,81.795 U1.1 | length 31
  Top Layer w0.5: J1.A4-B9@158.737,76.995 158.737,75.595 v2@159.639,74.693
  Top Layer w0.7: v2(159.639,74.549) v2@159.639,74.693
  Top Layer w1: U1.1 147.193,80.518 147.688,80.023 148.946,80.023 C1.1 v2@148.971,81.788 ; J3.1@172.698,81.795 172.698,81.245 173.996,79.947 175.577,79.947 v2(175.768,79.756)
  Bottom Layer w0.7: v2(148.971,82.296) 150.586,83.911 153.452,83.911 159.639,77.724 v2(159.639,74.549)
pads on no net: J1.A5 J1.A8 J1.B5 J1.B6 J1.B7 J1.B8 J3. J3.1@172.698,77.295 J3.2 J4.6 J6.5 J6.6 SW1.2 U2.3 U2.6 U2.8 U2.9 U2.10 U2.11 U2.12 U2.13 U2.14 U2.22 U2.23 U2.24 U2.27 U2.28

## Polygon pours and split planes (outlines as drawn)
no net on Top Layer "NONET_L01_P003" (solid, pour order 3): 129.032,86.995 149.733,86.995 149.733,69.977 149.606,69.85 149.225,70.231 128.905,70.231
GND on Top Layer (solid, pour order 1): 167 vertices, not listed, extent 144.016,43.564 149.349,47.497
GND on Top Layer (solid, pour order 0): 157.012,78.823 157.269,78.717 157.489,78.547 157.659,78.327 157.765,78.07 157.801,77.795 157.801,76.739 157.813,76.728 157.871,76.69 157.917,76.637 157.97,76.591 158.008,76.533 158.054,76.481 158.154,76.332 158.185,76.269 158.223,76.211 158.246,76.145 158.277,76.083 158.29,76.014 158.313,75.948 158.348,75.773 158.352,75.703 158.366,75.635 158.361,75.565 158.366,75.495 158.352,75.427 158.348,75.357 158.313,75.182 158.29,75.116 158.277,75.047 158.246,74.985 158.223,74.919 158.185,74.861 158.154,74.798 158.054,74.649 158.008,74.597 157.97,74.539 157.917,74.493 157.871,74.44 157.813,74.402 157.761,74.356 157.612,74.256 157.549,74.225 157.491,74.187 157.425,74.164 157.363,74.133 157.294,74.12 157.228,74.097 157.053,74.062 156.983,74.058 156.915,74.044 156.845,74.049 156.775,74.044 156.707,74.058 156.637,74.062 156.462,74.097 156.396,74.12 156.337,74.131 156.278,74.12 156.212,74.097 156.037,74.062 155.967,74.058 155.899,74.044 155.829,74.049 155.759,74.044 155.691,74.058 155.621,74.062 155.446,74.097 155.38,74.12 155.311,74.133 155.249,74.164 155.183,74.187 155.125,74.225 155.062,74.256 154.913,74.356 154.861,74.402 154.803,74.44 154.757,74.493 154.704,74.539 154.666,74.597 154.62,74.649 154.52,74.798 154.489,74.861 154.451,74.919 154.428,74.985 154.397,75.047 154.384,75.116 154.361,75.182 154.326,75.357 154.322,75.427 154.308,75.495 154.313,75.565 154.308,75.635 154.322,75.703 154.326,75.773 154.361,75.948 154.384,76.014 154.397,76.083 154.428,76.145 154.451,76.211 154.489,76.269 154.52,76.332 154.62,76.481 154.666,76.533 154.704,76.591 154.757,76.637 154.803,76.69 154.861,76.728 154.873,76.739 154.873,77.795 154.909,78.07 155.015,78.327 155.185,78.547 155.405,78.717 155.662,78.823 155.937,78.859 156.237,78.859 156.337,78.846 156.437,78.859 156.737,78.859
GND on Bottom Layer (solid, pour order 2): 282 vertices, not listed, extent 146.18,43.564 158.366,77.088
GND on GND (split plane): 177.29,25.91 128.399,25.91 128.399,90.041 177.29,90.041
+5 on 5V (split plane): 177.29,25.91 128.399,25.91 128.399,90.041 177.29,90.041
3V3 on 3V3 (split plane): 177.29,25.91 128.399,25.91 128.399,90.041 177.29,90.041
GND on GND2 (split plane): 177.29,25.91 128.399,25.91 128.399,90.041 177.29,90.041

## Other copper
Top Layer:
  pour cut-out: 147.716,46.584 147.732,46.587 147.907,46.552 147.933,46.534 147.964,46.528 148.113,46.429 148.13,46.403 148.156,46.386 148.255,46.237 148.261,46.206 148.279,46.18 148.314,46.005 148.308,45.974 148.314,45.943 148.279,45.768 148.261,45.742 148.255,45.711 148.188,45.611 148.171,45.585 148.24,45.54 148.257,45.514 148.283,45.497 148.382,45.348 148.388,45.317 148.406,45.291 148.441,45.116 148.435,45.085 148.441,45.054 148.406,44.879 148.388,44.853 148.382,44.822 148.283,44.673 148.257,44.656 148.24,44.63 148.091,44.531 148.06,44.525 148.034,44.507 147.859,44.472 147.828,44.478 147.797,44.472 147.622,44.507 147.596,44.525 147.565,44.531 147.416,44.63 147.399,44.656 147.373,44.673 147.274,44.822 147.268,44.853 147.25,44.879 147.215,45.054 147.221,45.085 147.215,45.116 147.221,45.142 147.109,45.142 147.08,45.154 147.063,45.154 147.055,45.142 147.049,45.111 147,45.037 146.974,45.019 146.956,44.993 146.882,44.944 146.851,44.938 146.825,44.92 146.738,44.903 146.722,44.906 146.707,44.9 145.307,44.9 145.292,44.906 145.276,44.903 145.189,44.92 145.163,44.938 145.132,44.944 145.058,44.993 145.04,45.019 145.014,45.037 144.965,45.111 144.959,45.142 144.941,45.168 144.924,45.255 144.93,45.286 144.924,45.317 144.941,45.404 144.959,45.43 144.965,45.461 145.014,45.535 145.04,45.553 145.058,45.579 145.106,45.611 145.058,45.643 145.04,45.669 145.014,45.687 144.965,45.761 144.959,45.792 144.941,45.818 144.924,45.905 144.93,45.936 144.924,45.967 144.941,46.054 144.959,46.08 144.965,46.111 145.014,46.185 145.04,46.203 145.058,46.229 145.132,46.278 145.163,46.284 145.189,46.302 145.276,46.319 145.292,46.316 145.307,46.322 146.707,46.322 146.722,46.316 146.738,46.319 146.825,46.302 146.851,46.284 146.882,46.278 146.956,46.229 146.974,46.203 147,46.185 147.049,46.111 147.055,46.08 147.073,46.054 147.09,45.967 147.084,45.936 147.09,45.905 147.087,45.889 147.099,45.889 147.088,45.943 147.094,45.974 147.088,46.005 147.123,46.18 147.141,46.206 147.147,46.237 147.246,46.386 147.272,46.403 147.289,46.429 147.438,46.528 147.469,46.534 147.495,46.552 147.67,46.587 147.686,46.584 147.701,46.59
  pour cut-out: 156.848,77.906 156.894,77.795 156.894,76.645 156.848,76.534 156.737,76.488 156.673,76.488 156.673,76.149 156.814,76.178 156.83,76.175 156.845,76.181 156.86,76.175 156.876,76.178 157.051,76.143 157.077,76.125 157.108,76.119 157.257,76.02 157.274,75.994 157.3,75.977 157.399,75.828 157.405,75.797 157.423,75.771 157.458,75.596 157.452,75.565 157.458,75.534 157.423,75.359 157.405,75.333 157.399,75.302 157.3,75.153 157.274,75.136 157.257,75.11 157.108,75.011 157.077,75.005 157.051,74.987 156.876,74.952 156.845,74.958 156.814,74.952 156.639,74.987 156.613,75.005 156.582,75.011 156.433,75.11 156.416,75.136 156.39,75.153 156.337,75.233 156.284,75.153 156.258,75.136 156.241,75.11 156.092,75.011 156.061,75.005 156.035,74.987 155.86,74.952 155.829,74.958 155.798,74.952 155.623,74.987 155.597,75.005 155.566,75.011 155.417,75.11 155.4,75.136 155.374,75.153 155.275,75.302 155.269,75.333 155.251,75.359 155.216,75.534 155.222,75.565 155.216,75.596 155.251,75.771 155.269,75.797 155.275,75.828 155.374,75.977 155.4,75.994 155.417,76.02 155.566,76.119 155.597,76.125 155.623,76.143 155.798,76.178 155.814,76.175 155.829,76.181 155.844,76.175 155.86,76.178 156.001,76.149 156.001,76.488 155.937,76.488 155.826,76.534 155.78,76.645 155.78,77.795 155.826,77.906 155.937,77.952 156.237,77.952 156.337,77.91 156.437,77.952 156.737,77.952
Bottom Layer:
  pour cut-out: 172 vertices and 0 holes, not listed, extent 147.088,44.472 157.458,76.181

## Silkscreen, mask and mechanical layers (free items; w line width, h text height)
Top Overlay:
  text "RST BTN" at 133.985,69.088 h1.52
  text "A5" at 171.747,66.845 h0.8
  text "A4" at 171.747,64.305 h0.8
  text "D0" at 153.967,63.67 h0.8
  text "A3" at 171.747,61.765 h0.8
  text "D1" at 153.967,61.257 h0.8
  text "A2" at 171.747,59.225 h0.8
  text "D2" at 153.967,58.717 h0.8
  text "A1" at 171.88,56.685 h0.8
  text "D3" at 153.967,56.177 h0.8
  text "A0" at 171.747,54.272 h0.8
  text "D4" at 153.967,53.637 h0.8
  text "AREF" at 170.477,43.223 h0.8
  text "D13" at 171.36,41.191 h0.8
  text "D12" at 171.36,38.524 h0.8
  text "D11" at 171.493,35.984 h0.8
  text "Arduino" at 133.001,33.77 h3
  text "D5" at 158.453,29.38 h0.8 r90
  text "D6" at 160.993,29.38 h0.8 r90
  text "D7" at 163.533,29.38 h0.8 r90
  text "D8" at 166.073,29.38 h0.8 r90
  text "D9" at 168.613,29.38 h0.8 r90
  text "D10" at 171.28,29.38 h0.8 r90
  text "Knock-off" at 130.502,28.69 h3